# Altium PCB XXX — копия.PcbDoc (part 1 of 2)
Units mm, origin at the board's own origin, x right, y up, seen from the top; angles counter-clockwise.
Board outline 220 x 115 mm, 2 copper layers (Top Layer, Top, Bottom Layer, Bottom); 162 components, 124 nets, 635 pads, 86 vias.
Unrouted connection lines stored in the file: 138.
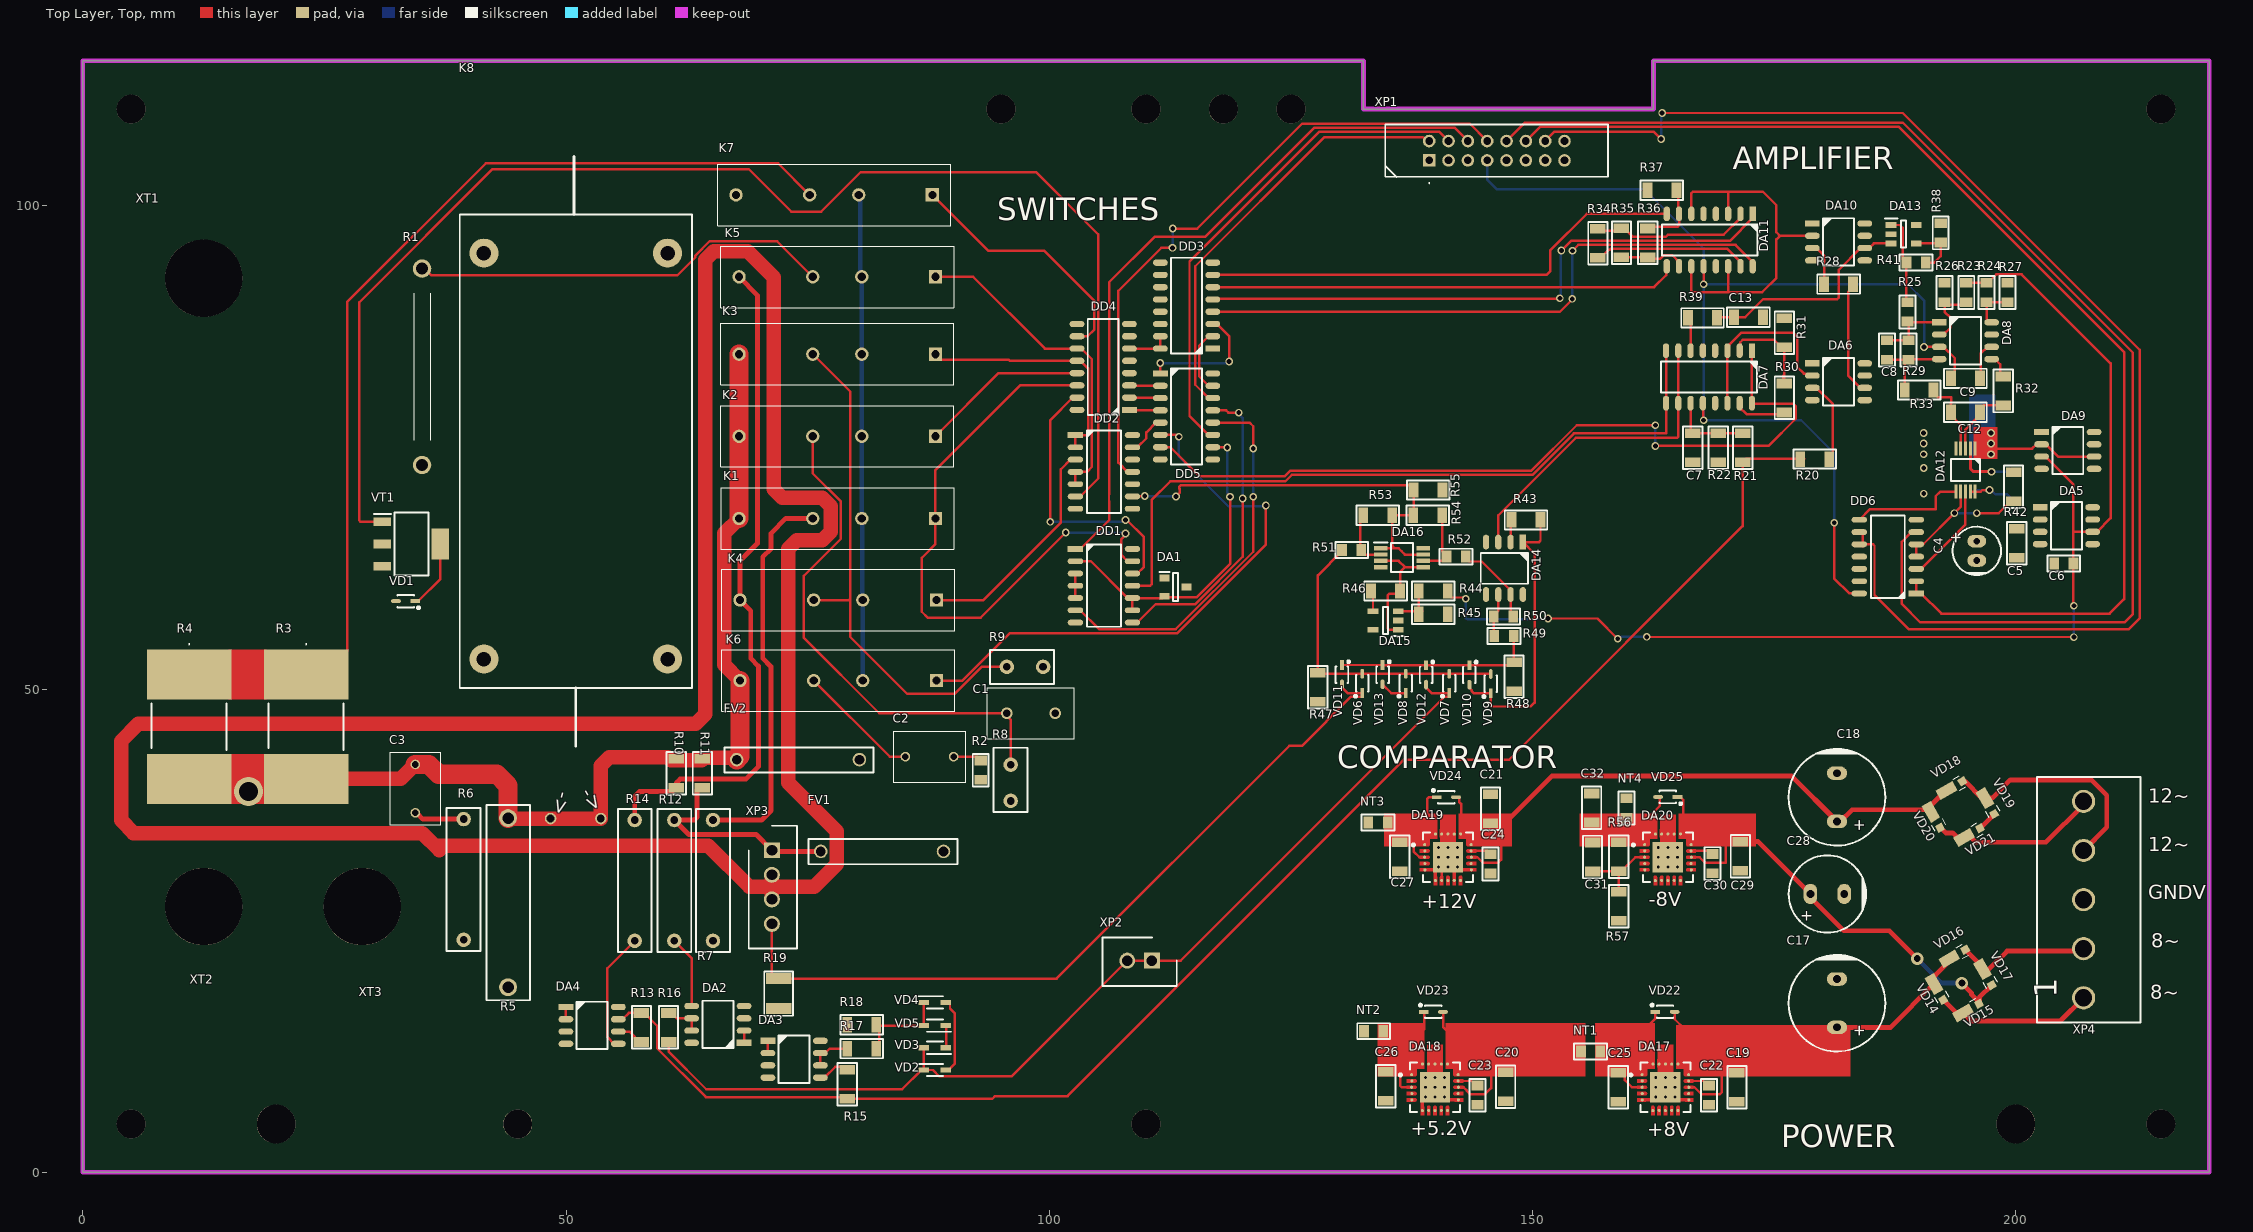
[diagram p0: Top Layer, Top view]
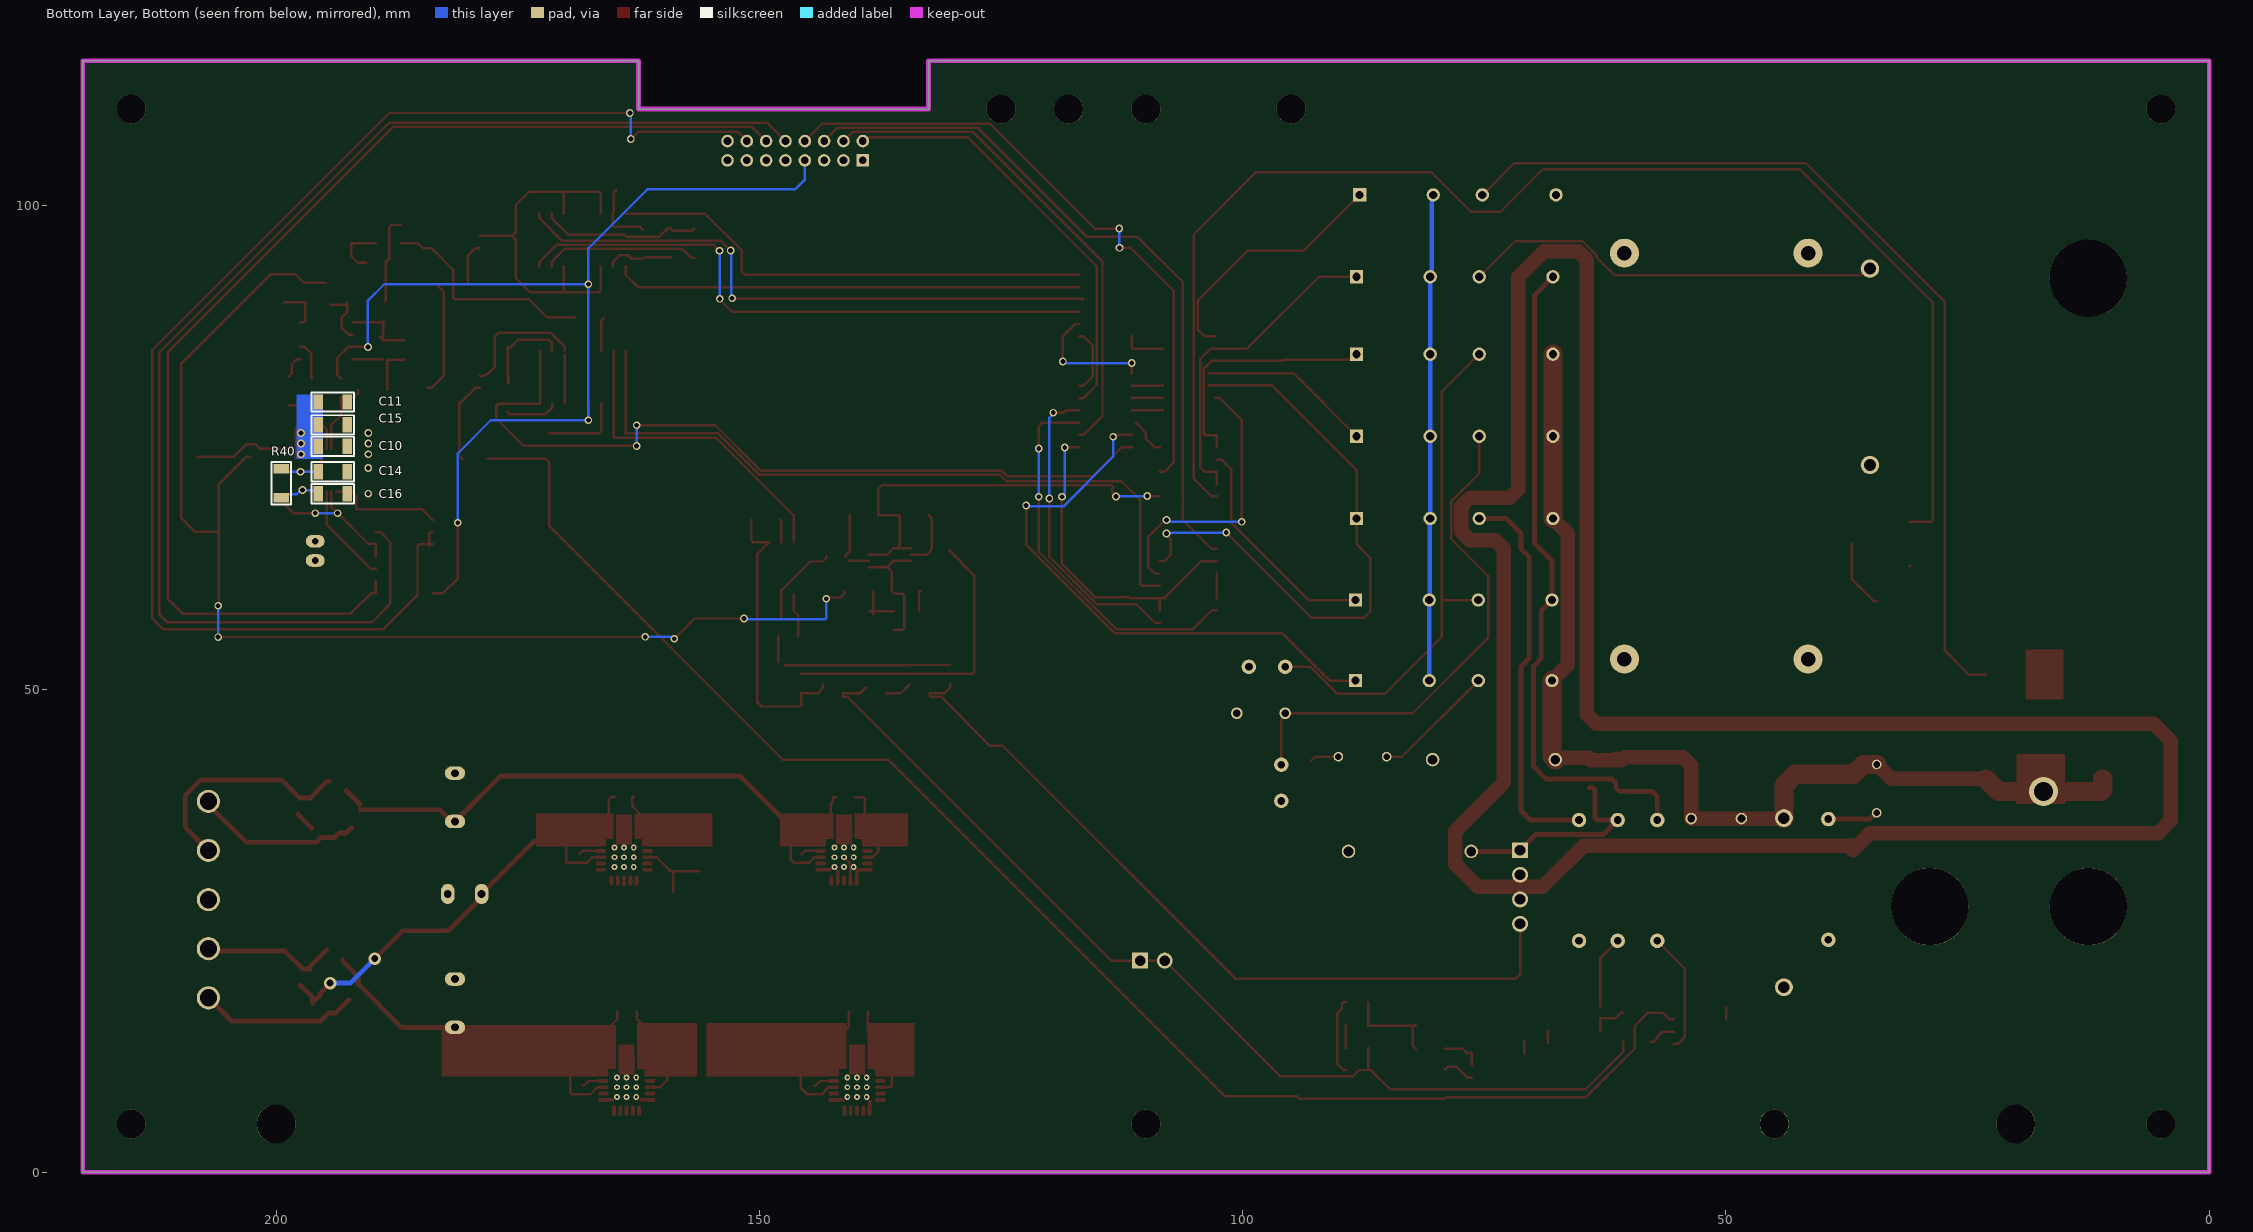
[diagram p1: Bottom Layer, Bottom view, seen from below]
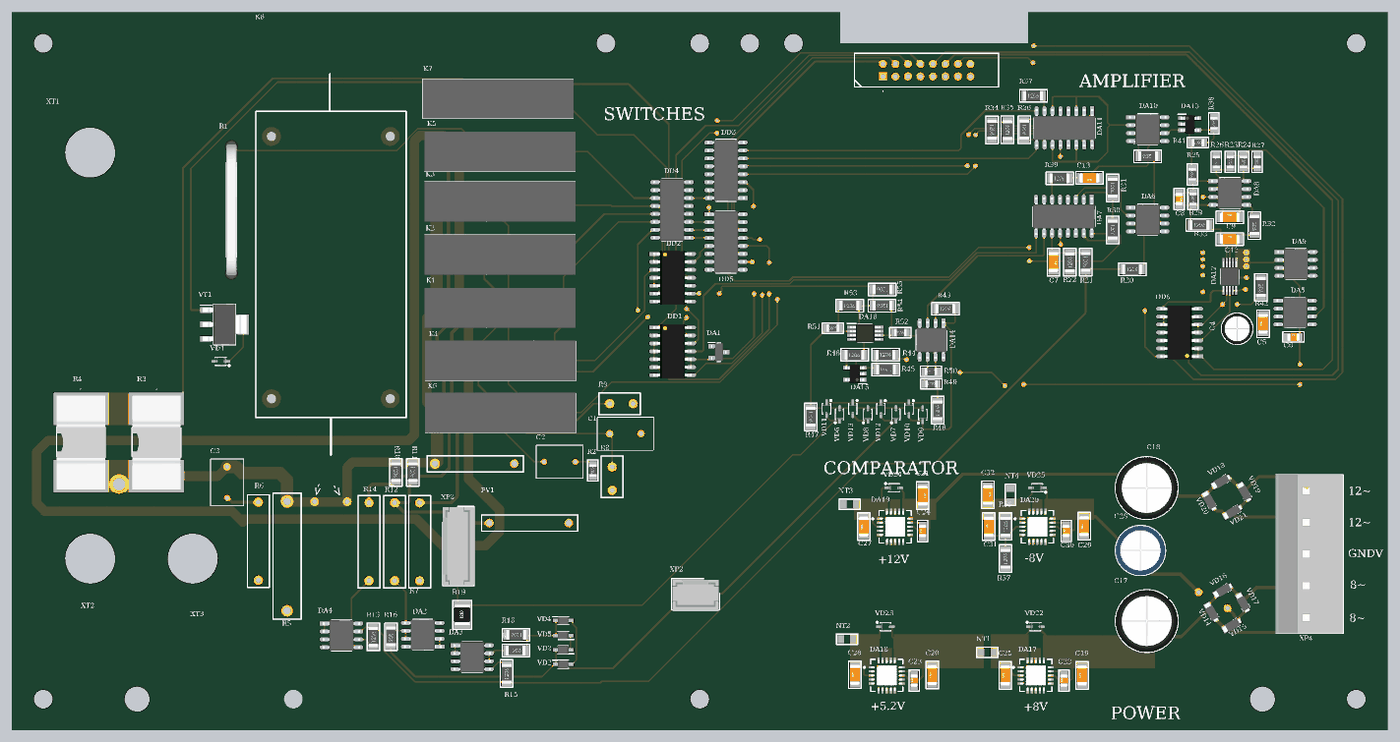
[diagram p3: 3D render of the assembled board from above, using the file's embedded part models]
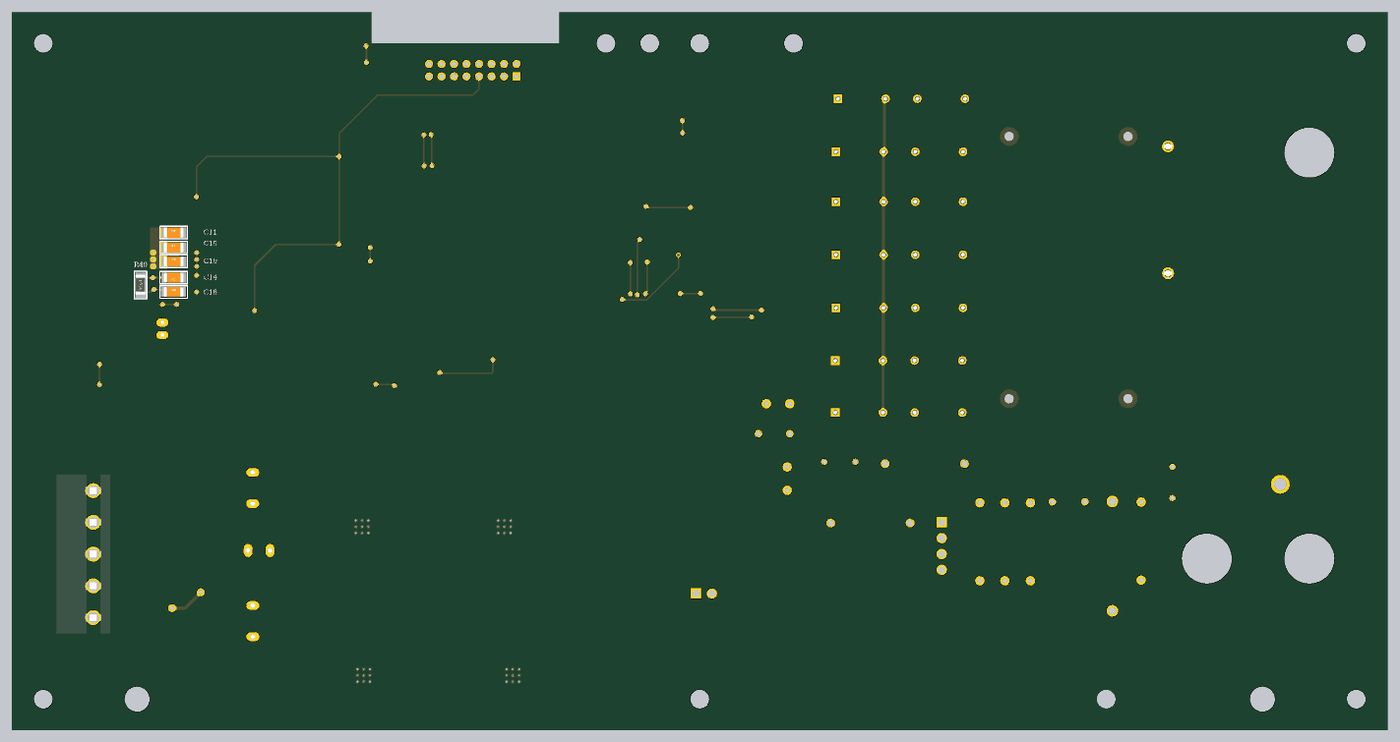
[diagram p4: 3D render of the assembled board from below, using the file's embedded part models]

## Layer stack, top to bottom
Top Solder, Top Mask: solder mask 0.0102, Solder Resist, Dk 3.5
Top Layer, Top: signal copper 0.0356
Dielectric 1: dielectric 0.32, FR-4, Dk 4.8
Bottom Layer, Bottom: signal copper 0.0356
Bottom Solder, Bot Mask: solder mask 0.0102, Solder Resist, Dk 3.5

## Board outline
132.5,110 132.5,115 0,115 0,0 220,0 220,115 162.5,115 162.5,110

## Design rules (kind name [scope] priority, off if disabled: settings)
Clearance "Clearance_Bottom Layer, Bottom" [ExistsOnLayer('Bottom Layer, Bottom') vs ExistsOnLayer('Bottom Layer, Bottom')] p1: gap=0.15 ignorepadtopadclearanceinfootprint=FALSE except(0.2: Arc-Arc Arc-Track Track-Track; 0.3: THPad-THPad)
Clearance [All] p2: gap=0.254 ignorepadtopadclearanceinfootprint=FALSE except(0.15: Arc-Arc Arc-Track Track-Track; 0.2: Arc-THPad Track-THPad THPad-THPad; 0.3: Arc-Via Track-Via THPad-Via Via-Via)
PlaneClearance [All] p1: clearance=0.254
PolygonConnect PolygonConnect_14 [IsPolygon And InNet('NET00015') And OnLayer('Bottom Layer, Bottom') vs IsVia] p1: connectstyle=Direct reliefconductorwidth=0.381 reliefentries=4 polygonreliefangle="90 Angle" airgapwidth=0.254
PolygonConnect PolygonConnect_13 [IsPolygon And InNet('NET00015') And OnLayer('Bottom Layer, Bottom') vs IsPad] p2: connectstyle=Relief reliefconductorwidth=0.5 reliefentries=4 polygonreliefangle="90 Angle" airgapwidth=0.254
PolygonConnect PolygonConnect_12 [IsPolygon And InNet('GNV') And OnLayer('Bottom Layer, Bottom') vs IsVia] p3: connectstyle=Direct reliefconductorwidth=0.381 reliefentries=4 polygonreliefangle="90 Angle" airgapwidth=0.254
PolygonConnect PolygonConnect_11 [IsPolygon And InNet('GNV') And OnLayer('Bottom Layer, Bottom') vs IsPad] p4: connectstyle=Relief reliefconductorwidth=0.3 reliefentries=4 polygonreliefangle="90 Angle" airgapwidth=0.254
PolygonConnect PolygonConnect_10 [IsPolygon And InNet('GRD') And OnLayer('Bottom Layer, Bottom') vs IsVia] p5: connectstyle=Direct reliefconductorwidth=0.381 reliefentries=4 polygonreliefangle="90 Angle" airgapwidth=0.254
PolygonConnect PolygonConnect_9 [IsPolygon And InNet('GRD') And OnLayer('Bottom Layer, Bottom') vs IsPad] p6: connectstyle=Direct reliefconductorwidth=0.5 reliefentries=4 polygonreliefangle="90 Angle" airgapwidth=0.254
PolygonConnect PolygonConnect_8 [IsPolygon And InNet('NET00070') And OnLayer('Bottom Layer, Bottom') vs IsVia] p7: connectstyle=Direct reliefconductorwidth=0.381 reliefentries=4 polygonreliefangle="90 Angle" airgapwidth=0.254
PolygonConnect PolygonConnect_7 [IsPolygon And InNet('NET00070') And OnLayer('Bottom Layer, Bottom') vs IsPad] p8: connectstyle=Direct reliefconductorwidth=0.5 reliefentries=4 polygonreliefangle="90 Angle" airgapwidth=0.254
PolygonConnect PolygonConnect_6 [IsPolygon And InNet('GNV') And OnLayer('Top Layer, Top') vs IsVia] p9: connectstyle=Direct reliefconductorwidth=0.381 reliefentries=4 polygonreliefangle="90 Angle" airgapwidth=0.254
PolygonConnect PolygonConnect_5 [IsPolygon And InNet('GNV') And OnLayer('Top Layer, Top') vs IsPad] p10: connectstyle=Relief reliefconductorwidth=0.3 reliefentries=4 polygonreliefangle="90 Angle" airgapwidth=0.254
PolygonConnect PolygonConnect_4 [IsPolygon And InNet('GRD') And OnLayer('Top Layer, Top') vs IsVia] p11: connectstyle=Direct reliefconductorwidth=0.381 reliefentries=4 polygonreliefangle="90 Angle" airgapwidth=0.254
PolygonConnect PolygonConnect_3 [IsPolygon And InNet('GRD') And OnLayer('Top Layer, Top') vs IsPad] p12: connectstyle=Direct reliefconductorwidth=0.5 reliefentries=4 polygonreliefangle="90 Angle" airgapwidth=0.254
PolygonConnect PolygonConnect_2 [IsPolygon And InNet('NET00070') And OnLayer('Top Layer, Top') vs IsVia] p13: connectstyle=Direct reliefconductorwidth=0.381 reliefentries=4 polygonreliefangle="90 Angle" airgapwidth=0.254
PolygonConnect PolygonConnect_1 [IsPolygon And InNet('NET00070') And OnLayer('Top Layer, Top') vs IsPad] p14: connectstyle=Direct reliefconductorwidth=0.5 reliefentries=4 polygonreliefangle="90 Angle" airgapwidth=0.254
PolygonConnect [All] p15: connectstyle=Relief reliefconductorwidth=0.254 reliefentries=4 polygonreliefangle="90 Angle" airgapwidth=0.254
RoutingVias [All] p1: holewidth=0.5 width=0.8 viastyle="Through Hole" minholewidth=0.5 minwidth=0.5 maxholewidth=1.2 maxwidth=1.8
SolderMaskExpansion [All] p1: expansion=0.102 istentingtop=FALSE
SupplyNets "Schematic Supply Nets_19" [InNet('GNDV')] p1: voltage=0.000
SupplyNets "Schematic Supply Nets_18" [InNet('+12V')] p2: voltage=0.000
SupplyNets "Schematic Supply Nets_17" [InNet('x8')] p3: voltage=0.000
SupplyNets "Schematic Supply Nets_16" [InNet('+5.2V')] p4: voltage=0.000
SupplyNets "Schematic Supply Nets_15" [InNet('x2')] p5: voltage=0.000
SupplyNets "Schematic Supply Nets_13" [InNet('x10')] p6: voltage=0.000
SupplyNets "Schematic Supply Nets_12" [InNet('AMP_IN')] p7: voltage=0.000
SupplyNets "Schematic Supply Nets_11" [InNet('-8V')] p8: voltage=0.000
SupplyNets "Schematic Supply Nets_10" [InNet('GRD')] p9: voltage=0.000
SupplyNets "Schematic Supply Nets_9" [InNet('x4')] p10: voltage=0.000
SupplyNets "Schematic Supply Nets_8" [InNet('U0')] p11: voltage=0.000
SupplyNets "Schematic Supply Nets_7" [InNet('x1')] p12: voltage=0.000
SupplyNets "Schematic Supply Nets_6" [InNet('C'')] p13: voltage=0.000
SupplyNets "Schematic Supply Nets_4" [InNet('Uc')] p14: voltage=0.000
SupplyNets "Schematic Supply Nets_3" [InNet('+4.096V')] p15: voltage=0.000
SupplyNets "Schematic Supply Nets_2" [InNet('+8V')] p16: voltage=0.000
SupplyNets "Schematic Supply Nets_1" [InNet('-5.2V')] p17: voltage=0.000
SupplyNets "Schematic Supply Nets" [InNet('нА')] p18: voltage=0.000
Width Width_1 [InNet('GRD')] p1: maxlimit=1.5 minlimit=1.5 preferedwidth=1.5
Width [All] p2: maxlimit=1.5 minlimit=0.25 preferedwidth=0.25
29 further rules are at their usual default settings.

## Classes and differential pairs
component class Switches: C1 C2 C3 DA1 DA2 DA3 DA4 DD1 DD2 DD3 DD4 DD5 FV1 FV2 K1 K2 K3 K4 K5 K6 K7 K8 R1 R2 R3 R4 R5 R6 R7 R8 R9 R10 R11 R12 R13 R14 R15 R16 R17 R18 R19 S1 S2 VD1 VD2 VD3 VD4 VD5 VT1 X1 X2 X3 XP1 XP2 XP3 XP? XT1 XT2 XT3
component class PowerSupply: C17 C18 C19 C20 C21 C22 C23 C24 C25 C26 C27 C28 C29 C30 C31 C32 DA17 DA18 DA19 DA20 NT1 NT2 NT3 NT4 R56 R57 VD14 VD15 VD16 VD17 VD18 VD19 VD20 VD21 VD22 VD23 VD24 VD25 XP4
component class Comparator: DA14 DA15 DA16 R43 R44 R45 R46 R47 R48 R49 R50 R51 R52 R53 R54 R55 VD6 VD7 VD8 VD9 VD10 VD11 VD12 VD13
component class Amplifier: C4 C5 C6 C7 C8 C9 C10 C11 C12 C13 C14 C15 C16 DA5 DA6 DA7 DA8 DA9 DA10 DA11 DA12 DA13 DD6 R20 R21 R22 R23 R24 R25 R26 R27 R28 R29 R30 R31 R32 R33 R34 R35 R36 R37 R38 R39 R40 R41 R42

## Components (designator, comment, footprint, x,y, rotation, side; value= is the part's Value field where it differs from the comment)
C1 "К10-47Мб-500 В-3300 пФ+-10%" К10-47Мб-L9 98.1,47.5 r180 top
C2 "К10-47Мб-500 В-15 нФ +-10%" К10-47Мб-L7.5 90.1,43 r180 top
C3 "К10-47Мб-500 В-270 пФ +-10%" К10-47Мб-L7.5 34.4,37.2 r90 top
C4 "JRB-50В-4,7мкФ" "CAP TH ALUM ELEC D5.00mm S2.00mm H11.00mm" 195.955,64.3 r90 top
C5 "1206-X7R-50 B-0,1 мкФ+-10%" "CAP: 1206" 200.1,65.1 r90 top value="0,1 мкФ"
C6 "0805-X7R-25 В-0,1 мкФ +-10%" "CAP: 0805" 204.955,63 r0 top value="0,1 мкФ"
C7 "1206-X7R-50 B-0,01 мкФ+-10%" "CAP: 1206" 166.571,74.978 r270 top value="0,01 мкФ"
C8 "0805-C0G-50 В-240 пФ +-5%" "CAP: 0805" 186.684,85.08 r270 top value="10 пФ"
C9 "1206-X7R-50 B-0,1 мкФ+-10%" "CAP: 1206" 194.784,82.14 r0 top value="0,1 мкФ"
C10 "1206-X7R-10 B-10 мкФ+-10%" "CAP: 1206" 194.134,75.105 r180 bottom value="10 мкФ"
C11 "1206-X7R-50 B-2,2 мкФ+-10%" "CAP: 1206" 194.134,79.7 r180 bottom value="2,2 мкФ"
C12 "1206-X7R-50 B-0,01 мкФ+-10%" "CAP: 1206" 194.784,78.64 r0 top value="0,01 мкФ"
C13 "1206-X7R-50 B-0,01 мкФ+-10%" "CAP: 1206" 172.333,88.474 r180 top value="0,01 мкФ"
C14 "1206-X7R-50 B-2,2 мкФ+-10%" "CAP: 1206" 194.134,72.489 r0 bottom value="2,2 мкФ"
C15 "1206-X7R-50 B-2,2 мкФ+-10%" "CAP: 1206" 194.134,77.327 r180 bottom value="2,2 мкФ"
C16 "1206-X7R-50 B-0,33 мкФ+-10%" "CAP: 1206" 194.155,70.2 r180 bottom value="0,33 мкФ"
C17 "JRB-25В-1000 мкФ" "CAP TH ALUM ELEC D10.00mm S5.00mm H21.00mm" 181.493,17.5 r270 top
C18 "JRB-35В-470мкФ" "CAP TH ALUM ELEC D10.00mm S5.00mm H17.00mm" 181.493,38.8 r270 top
C19 "1206-X7R-50 B-10 мкФ+-10%" "CAP: 1206" 171.143,8.8 r90 top value="10 мкФ"
C20 "1206-X7R-50 B-10 мкФ+-10%" "CAP: 1206" 147.2,8.867 r90 top value="10 мкФ"
C21 "1206-X7R-50 B-10 мкФ+-10%" "CAP: 1206" 145.643,37.6 r270 top value="10 мкФ"
C22 "0805-X7R-25 В-1 мкФ +-10%" "CAP: 0805" 168.243,7.975 r90 top value="1 мкФ"
C23 "0805-X7R-25 В-1 мкФ +-10%" "CAP: 0805" 144.3,7.975 r90 top value="1 мкФ"
C24 "0805-X7R-25 В-1 мкФ +-10%" "CAP: 0805" 145.643,31.915 r90 top value="1 мкФ"
C25 "1206-X7R-25 B-47мкФ+-10%" "CAP: 1206" 158.86,8.8 r90 top value="51 пФ"
C26 "1206-X7R-25 B-47мкФ+-10%" "CAP: 1206" 134.8,8.899 r90 top value="51 пФ"
C27 "1206-X7R-25 B-47мкФ+-10%" "CAP: 1206" 136.243,32.635 r90 top value="51 пФ"
C28 "JRB-25В-220мкФ" "CAP TH ALPOLY D8.00mm S3.50mm H12.00mm" 180.493,28.8 r180 top
C29 "1206-X7R-50 B-10 мкФ+-10%" "CAP: 1206" 171.5,32.711 r90 top value="10 мкФ"
C30 "0805-X7R-25 В-1 мкФ +-10%" "CAP: 0805" 168.6,31.933 r90 top value="1 мкФ"
C31 "1206-X7R-50 B-0,01 мкФ+-10%" "CAP: 1206" 156.2,32.625 r90 top value="0,01 мкФ"
C32 "1206-X7R-25 B-47мкФ+-10%" "CAP: 1206" 156.1,37.7 r270 top value="51 пФ"
DA1 "MAX809S" SOT-23-3 111.9,61.5 r0 top
DA2 "TLV9152IDR" 8-SOIC 65.7,15.3 r180 top
DA3 "TLV9152IDR" 8-SOIC 73.6,11.7 r0 top
DA4 "TLV9152IDR" 8-SOIC 52.7,15.2 r0 top
DA5 "ADR434BR" 8-SOIC 205.23,66.9 r0 top
DA6 "ADA4637-1ARZ" 8-SOIC 181.651,81.795 r0 top
DA7 "ADG433BR" 16-SOIC 168.248,82.295 r270 top
DA8 "ADA4941-1YRZ" 8-SOIC 194.784,86.04 r0 top
DA9 "AD8031BRZ" 8-SOIC 205.372,74.685 r0 top
DA10 "ADA4637-1ARZ" 8-SOIC 181.651,96.258 r0 top
DA11 "ADG431BR" 16-SOIC 168.324,96.458 r270 top
DA12 "AD7691BRM" 10-MSOP 194.784,72.655 r270 top
DA13 "TLV9151IDR" SOT-23-5 188.378,97.063 r0 top
DA14 "TLV9152IDR" 8-SOIC 147.084,62.493 r270 top
DA15 "TLV9151IDR" SOT-23-5 134.784,57.093 r180 top
DA16 "TLV1842" 8-VSSOP 136.484,63.593 r0 top
DA17 "TPS7A4701" 20-VQFN 163.743,8.8 r0 top
DA18 "TPS7A4701" 20-VQFN 139.9,8.8 r0 top
DA19 "TPS7A4701" 20-VQFN 141.243,32.6 r0 top
DA20 "TPS7A3301" 20-VQFN 164,32.6 r0 top
DD1 "IN74HC00AD" 14-soic 102.7,64.497 r0 top
DD2 "IN74HC08AD" 14-SOIC 102.7,76.279 r0 top
DD3 "IN74HC139AD" 16-SOIC 114.2,89.674 r180 top
DD4 "IN74HC138AD" 16-SOIC 105.575,83.323 r180 top
DD5 "IN74HC595AD" 16-SOIC 114.2,78.2 r0 top
DD6 "IN74HC08AD" 14-SOIC 189.7,59.89 r180 top
FV1 "2027-09-B19" 2027-09-B19 82.7,33.2 r180 top
FV2 "2027-09-B19" 2027-09-B19 74,42.7 r180 top
K1 "SIL05-1A72-71L" SIL05 88.218,67.65 r180 top
K2 "SIL05-1A72-71L" SIL05 88.218,76.15 r180 top
K3 "SIL05-1A72-71L" SIL05 88.218,84.65 r180 top
K4 "SIL05-1A72-71L" SIL05 88.317,59.211 r180 top
K5 "SIL05-1A72-71L" SIL05 88.218,92.65 r180 top
K6 "SIL05-1A72-71L" SIL05 88.317,50.878 r180 top
K7 "SIL05-1A72-71L" SIL05 87.9,101.128 r180 top
K8 "УШЯИ.685442.092vs2Rel" УШЯИ.685442.092vs2Rel 51,50.1 r90 top locked
NT1 "NetTie" NetTie 157,12.5 r180 top net-tie
NT2 "NetTie" NetTie 134.557,14.6 r180 top net-tie
NT3 "NetTie" NetTie 135,36.2 r180 top net-tie
NT4 "NetTie" NetTie 159.7,36.7 r90 top net-tie
R1 "OAR5-R050FLF" OAR5 35.1,73.18 r90 top value="0.05 Ом"
R2 "0805-27 Ом+-5%" 0805 92.9,41.6 r90 top value="27 Ом"
R3 "WSL5931L5000FEA" WSL5931L5000FEA 23.1,46.1 r270 top value="0,5 миллиОм"
R4 "WSL5931L5000FEA" WSL5931L5000FEA 11,46.1 r270 top value="0,5 миллиОм"
R5 "С2-29В-0,25-4,99 МОм +-0.1%" С2-29В-0,25(140.02.0204.00.00) 44,27.9 r90 top
R6 "С2-29В-0,125-22 Ом +-0.1%-1,0-А" С2-29В-0,125(140.02.0202.00.00) 39.4,30.3 r90 top
R7 "С2-29В-0,125-49,9 кОм +-0.1%-1,0-А" С2-29В-0,125(140.02.0202.00.00) 65.2,30.2 r90 top
R8 "С2-29В-0,125-499 Ом +-0.1%-1,0-А" С2-29В-0,125(220.03.0401.00.00) 96,40.3 r90 top
R9 "С2-29В-0,125-4,99 Ом +-0.1%-1,0-А" С2-29В-0,125(220.03.0401.00.00) 97.475,52.3 r180 top
R10 "1206-91 кОм+-5%" 1206 61.391,41.3 r270 top value="91 кОм"
R11 "1206-100 Ом+-5%" 1206 64.108,41.3 r270 top value="100 Ом"
R12 "С2-29В-0,125-332 кОм+-0.1%-1,0-А" С2-29В-0,125(140.02.0202.00.00) 61.2,30.2 r90 top
R13 "1206-470 Ом+-5%" 1206 57.8,14.99 r90 top value="470 Ом"
R14 "С2-29В-0,125-332 кОм+-0.1%-1,0-А" С2-29В-0,125(140.02.0202.00.00) 57.1,30.2 r90 top
R15 "1206-470 Ом+-5%" 1206 79.096,9.1 r90 top value="470 Ом"
R16 "1206-51 Ом+-5%" 1206 60.6,14.99 r270 top value="51 Ом"
R17 "1206-22 Ом+-5%" 1206 80.596,12.805 r0 top value="22 Ом"
R18 "1206-22 Ом+-5%" 1206 80.596,15.277 r180 top value="22 Ом"
R19 "1210-1,1 кОм+-5%" 1210 72,18.5 r90 top value="1,1 кОм"
R20 "1206-470 Ом+-5%" 1206 179.2,73.8 r0 top value="470 Ом"
R21 "1206-5,1 кОм+-5%" 1206 171.729,74.97 r270 top value="5,1 кОм"
R22 "1206-20 кОм+-5%" 1206 169.196,74.97 r90 top value="20 кОм"
R23 "0805-1 кОм+-0,1%" 0805 194.868,91.02 r270 top value="1 кОм"
R24 "0805-1 кОм+-0,1%" 0805 196.968,91.02 r270 top value="1 кОм"
R25 "0805-1 кОм+-0,1%" 0805 188.784,89.02 r270 top value="1 кОм"
R26 "0805-1 кОм+-0,1%" 0805 192.618,91.02 r90 top value="1 кОм"
R27 "0805-332 Ом+-0,1%" 0805 199.147,91.02 r270 top value="332 Ом"
R28 "1206-470 Ом+-5%" 1206 181.651,91.9 r180 top value="470 Ом"
R29 "0805-1 кОм+-0,1%" 0805 188.884,85.08 r270 top value="1 кОм"
R30 "1206-9,09 кОм+-1%" 1206 176.048,80.12 r270 top value="9,09 кОм"
R31 "1206-1 кОм+-1%" 1206 176.048,86.85 r270 top value="1 кОм"
R32 "1206-51 Ом+-5%" 1206 198.684,80.84 r270 top value="51 Ом"
R33 "1206-51 Ом+-5%" 1206 189.984,80.94 r0 top value="51 Ом"
R34 "1206-4,02 кОм+-0,1%" 1206 156.756,96.133 r270 top value="4,02 кОм"
R35 "1206-2 кОм+-0.1%" 1206 159.193,96.164 r90 top value="2 кОм"
R36 "1206-1 кОм+-0.1%" 1206 161.924,96.158 r270 top value="1 кОм"
R37 "1206-1 кОм+-0.1%" 1206 163.378,101.6 r0 top value="1 кОм"
R38 "0805-1 кОм+-0,1%" 0805 192.225,97.2 r270 top value="1 кОм"
R39 "1206-5,1 кОм+-5%" 1206 167.578,88.4 r0 top value="5,1 кОм"
R40 "1206-10 Ом+-5%" 1206 199.455,71.3 r270 bottom value="10 Ом"
R41 "0805-845 Ом+-0,1%" 0805 189.678,94.123 r180 top value="845 Ом"
R42 "1206-10 кОм+-5%" 1206 199.755,70.93 r270 top value="10 кОм"
R43 "1206-470 Ом+-5%" 1206 149.314,67.495 r0 top value="470 Ом"
R44 "1206-7,15 кОм+-1%" 1206 139.732,60.146 r0 top value="7,15 кОм"
R45 "1206-10 кОм+-0,5%" 1206 139.732,57.743 r180 top value="10 кОм"
R46 "1206-470 Ом+-5%" 1206 134.784,60.146 r0 top value="470 Ом"
R47 "1206-2,4 кОм+-5%" 1206 127.776,50.193 r270 top value="2,4 кОм"
R48 "1206-2,4 кОм+-5%" 1206 148.076,51.281 r90 top value="2,4 кОм"
R49 "0805-1 кОм+-0,1%" 0805 147.044,55.488 r180 top value="1 кОм"
R50 "0805-1 кОм+-0,1%" 0805 146.984,57.493 r0 top value="1 кОм"
R51 "0805-1 кОм+-0,1%" 0805 131.284,64.393 r0 top value="1 кОм"
R52 "0805-1 кОм+-0,1%" 0805 142.084,63.693 r180 top value="1 кОм"
R53 "1206-510 кОм+-1%" 1206 133.984,67.993 r0 top value="510 кОм"
R54 "1206-510 кОм+-1%" 1206 139.159,67.993 r180 top value="510 кОм"
R55 "1206-4,7 кОм+-5%" 1206 139.184,70.593 r180 top value="4,7 кОм"
R56 "1206-1,24 МОм+-1%" 1206 158.9,32.66 r90 top value="1,24 МОм"
R57 "1206-221 кОм+-1%" 1206 158.9,27.525 r90 top value="221 кОм"
VD1 "1N4148WS" SOD-323F 33.4,59.1 r180 top
VD2 "1N4007WS" SOD-323 88.164,10.587 r0 top
VD3 "1N4007WS" SOD-323 88.164,12.887 r180 top
VD4 "1N4007WS" SOD-323 88.164,17.575 r0 top
VD5 "1N4007WS" SOD-323 88.164,15.187 r180 top
VD6 "1N4148WS" SOD-323F 132.372,50.587 r90 top
VD7 "1N4148WS" SOD-323F 141.372,50.587 r90 top
VD8 "1N4148WS" SOD-323F 136.872,50.587 r90 top
VD9 "1N4148WS" SOD-323F 145.661,50.555 r90 top
VD10 "1N4148WS" SOD-323F 143.461,51.455 r270 top
VD11 "1N4148WS" SOD-323F 130.272,51.487 r270 top
VD12 "1N4148WS" SOD-323F 138.972,51.461 r270 top
VD13 "1N4148WS" SOD-323F 134.472,51.487 r270 top
VD14 "V1P22" DO-219AD 191.924,18.798 r300 top
VD15 "V1P22" DO-219AD 195.227,16.888 r30 top
VD16 "V1P22" DO-219AD 193.805,22.486 r30 top
VD17 "V1P22" DO-219AD 196.953,20.325 r300 top
VD18 "V1P22" DO-219AD 193.51,39.903 r30 top
VD19 "V1P22" DO-219AD 197.198,38.023 r300 top
VD20 "V1P22" DO-219AD 191.6,36.6 r300 top
VD21 "V1P22" DO-219AD 195.34,35.049 r30 top
VD22 "1N4148WS" SOD-323F 163.7,16.6 r0 top
VD23 "1N4148WS" SOD-323F 139.725,16.6 r0 top
VD24 "1N4148WS" SOD-323F 141.068,38.817 r0 top
VD25 "1N4148WS" SOD-323F 163.983,38.836 r180 top
VT1 "FZT658" SOT-23-4 31,67.3 r180 top
XP1 "DS1014-16SF1B" DS1014-16S 139.3,104.7 r0 top
XP2 "280370-2" 280370-2 110.6,21.9 r180 top
XP3 "280371-2" 280371-2 71.3,33.32 r270 top
XP4 "DS1074-5MVT6" DS1074-5MV 207,18.06 r90 top
XT1 "УШЯИ.685631.123" УШЯИ.685631.123 12.5,92.5 r0 top locked
XT2 "УШЯИ.685631.123" УШЯИ.685631.123 12.5,27.5 r0 top locked
XT3 "УШЯИ.685631.123" УШЯИ.685631.123 28.9,27.5 r0 top locked

## Footprints (in the part's own frame and the unit in brackets; to place one, negate y for a bottom-side part, rotate by r counter-clockwise, add the part's x,y. Pads: shape width x height; smd on the part's side, far side on the other; paste and mask are expansions set on the pad)
8-SOIC [mm] "Body 3.9mmx4.9mm 1.27 pitch"
  rect 1.525x0.65 smd: 1(-2.712,1.905)
  oval 1.525x0.65 smd: 2(-2.712,0.635) 3(-2.712,-0.635) 4(-2.712,-1.905) 5(2.712,-1.905) 6(2.712,-0.635) 7(2.712,0.635) 8(2.712,1.905)
  silkscreen extent -1.6,-2.45 1.6,2.45, body extent -3,-2.45 3,2.45, height 1.75
8-VSSOP [mm]
  rect 1.4x0.45 smd: 1(-2.2,0.975) 2(-2.2,0.325) 3(-2.2,-0.325) 4(-2.2,-0.975) 5(2.2,-0.975) 6(2.2,-0.325) 7(2.2,0.325) 8(2.2,0.975)
  silkscreen extent -2.9,-1.5 1.15,1.55, body extent -2.45,-1.5 2.45,1.5, height 1.1
10-MSOP [mm] "3x3 mm, pitch 0.5 mm"
  rect 1.45x0.3 smd: 1(-2.225,1) 2(-2.225,0.5) 3(-2.225,0) 4(-2.225,-0.5) 5(-2.225,-1) 6(2.225,-1) 7(2.225,-0.5) 8(2.225,0) 9(2.225,0.5) 10(2.225,1)
  silkscreen extent -1.15,-1.5 1.15,1.5, body extent -2.45,-1.5 2.45,1.5, height 0.95
14-soic [mm] "Body 8.6x3.9mm, pitch 1.27 mm"
  rect 1.6x0.6 smd: 1(0,0)
  rrect100% 1.6x0.6 smd: 2(0,-1.27) 3(0,-2.54) 4(0,-3.81) 5(0,-5.08) 6(0,-6.35) 7(0,-7.62) 8(5.9,-7.62) 9(5.9,-6.35) 10(5.9,-5.08) 11(5.9,-3.81) 12(5.9,-2.54) 13(5.9,-1.27) 14(5.9,0)
  round 0.5 on Mech13: ""(0.5,0)
  silkscreen extent 1.2,-8.05 4.7,0.45, body extent -0.12,-8.15 6.02,0.55, height 1.78
14-SOIC [mm] "Body 8.6x3.9mm, pitch 1.27 mm"
  rect 1.6x0.6 smd: 1(0,0)
  rrect100% 1.6x0.6 smd: 2(0,-1.27) 3(0,-2.54) 4(0,-3.81) 5(0,-5.08) 6(0,-6.35) 7(0,-7.62) 8(5.9,-7.62) 9(5.9,-6.35) 10(5.9,-5.08) 11(5.9,-3.81) 12(5.9,-2.54) 13(5.9,-1.27) 14(5.9,0)
  round 0.5 on Mech13: ""(0.5,0)
  silkscreen extent 1.2,-8.05 4.7,0.45, body extent -0.12,-8.15 6.02,0.55, height 1.78
16-SOIC [mm] "Body 3.9mm×9.9mm 1.27 pitch"
  rect 1.525x0.65 smd: 1(-2.712,4.445)
  oval 1.525x0.65 smd: 2(-2.712,3.175) 3(-2.712,1.905) 4(-2.712,0.635) 5(-2.712,-0.635) 6(-2.712,-1.905) 7(-2.712,-3.175) 8(-2.712,-4.445) 9(2.712,-4.445) 10(2.712,-3.175) 11(2.712,-1.905) 12(2.712,-0.635) 13(2.712,0.635) 14(2.712,1.905) 15(2.712,3.175) 16(2.712,4.445)
  silkscreen extent -1.6,-4.95 1.6,4.95, body extent -3,-4.95 3,4.95, height 1.75
20-VQFN [mm]
  round 0.315 smd paste-1000 mask+0: 1(-2.418,1.3) 2(-2.4,0.65) 3(-2.418,0) 4(-2.4,-0.65) 5(-2.4,-1.3) 6(-1.3,-2.418) 7(-0.65,-2.4) 8(0,-2.418) 9(0.65,-2.4) 10(1.3,-2.4) 11(2.418,-1.3) 12(2.4,-0.65) 13(2.418,0) 14(2.4,0.65) 15(2.4,1.3) 16(1.3,2.418) 17(0.65,2.4) 18(0,2.418) 19(-0.65,2.4) 20(-1.3,2.4)
  rect 3.15x3.15 smd paste-1000 mask+0: 21(0,0)
  Top Layer, Top region: -1.125,2.9 -1.125,2.075 -1.138,2.008 -1.176,1.951 -1.233,1.913 -1.3,1.9 -1.3,1.9 -1.367,1.913 -1.424,1.951 -1.462,2.008 -1.475,2.075 -1.475,2.075 -1.475,2.9
  Top Layer, Top region: -2.9,1.475 -2.075,1.475 -2.008,1.462 -1.951,1.424 -1.913,1.367 -1.9,1.3 -1.9,1.3 -1.913,1.233 -1.951,1.176 -2.008,1.138 -2.075,1.125 -2.075,1.125 -2.9,1.125
  Top Layer, Top region: -2.9,0.175 -2.075,0.175 -2.008,0.162 -1.951,0.124 -1.913,0.067 -1.9,0 -1.9,0 -1.913,-0.067 -1.951,-0.124 -2.008,-0.162 -2.075,-0.175 -2.075,-0.175 -2.9,-0.175
  Top Layer, Top region: -2.9,-1.125 -2.075,-1.125 -2.008,-1.138 -1.951,-1.176 -1.913,-1.233 -1.9,-1.3 -1.9,-1.3 -1.913,-1.367 -1.951,-1.424 -2.008,-1.462 -2.075,-1.475 -2.075,-1.475 -2.9,-1.475
  Top Layer, Top region: 2.9,-1.475 2.075,-1.475 2.008,-1.462 1.951,-1.424 1.913,-1.367 1.9,-1.3 1.9,-1.3 1.913,-1.233 1.951,-1.176 2.008,-1.138 2.075,-1.125 2.075,-1.125 2.9,-1.125
  Top Layer, Top region: -0.825,-2.9 -0.825,-2.075 -0.812,-2.008 -0.774,-1.951 -0.717,-1.913 -0.65,-1.9 -0.65,-1.9 -0.583,-1.913 -0.526,-1.951 -0.488,-2.008 -0.475,-2.075 -0.475,-2.075 -0.475,-2.9
  Top Layer, Top region: 0.825,2.9 0.825,2.075 0.812,2.008 0.774,1.951 0.717,1.913 0.65,1.9 0.65,1.9 0.583,1.913 0.526,1.951 0.488,2.008 0.475,2.075 0.475,2.075 0.475,2.9
  Top Layer, Top region: 0.175,2.9 0.175,2.075 0.162,2.008 0.124,1.951 0.067,1.913 0,1.9 0,1.9 -0.067,1.913 -0.124,1.951 -0.162,2.008 -0.175,2.075 -0.175,2.075 -0.175,2.9
  Top Layer, Top region: -0.475,2.9 -0.475,2.075 -0.488,2.008 -0.526,1.951 -0.583,1.913 -0.65,1.9 -0.65,1.9 -0.717,1.913 -0.774,1.951 -0.812,2.008 -0.825,2.075 -0.825,2.075 -0.825,2.9
  Top Layer, Top region: 1.475,2.9 1.475,2.075 1.462,2.008 1.424,1.951 1.367,1.913 1.3,1.9 1.3,1.9 1.233,1.913 1.176,1.951 1.138,2.008 1.125,2.075 1.125,2.075 1.125,2.9
  Top Layer, Top region: 1.125,-2.9 1.125,-2.075 1.138,-2.008 1.176,-1.951 1.233,-1.913 1.3,-1.9 1.3,-1.9 1.367,-1.913 1.424,-1.951 1.462,-2.008 1.475,-2.075 1.475,-2.075 1.475,-2.9
  Top Layer, Top region: 0.475,-2.9 0.475,-2.075 0.488,-2.008 0.526,-1.951 0.583,-1.913 0.65,-1.9 0.65,-1.9 0.717,-1.913 0.774,-1.951 0.812,-2.008 0.825,-2.075 0.825,-2.075 0.825,-2.9
  Top Layer, Top region: -0.175,-2.9 -0.175,-2.075 -0.162,-2.008 -0.124,-1.951 -0.067,-1.913 0,-1.9 0,-1.9 0.067,-1.913 0.124,-1.951 0.162,-2.008 0.175,-2.075 0.175,-2.075 0.175,-2.9
  Top Layer, Top region: -1.475,-2.9 -1.475,-2.075 -1.462,-2.008 -1.424,-1.951 -1.367,-1.913 -1.3,-1.9 -1.3,-1.9 -1.233,-1.913 -1.176,-1.951 -1.138,-2.008 -1.125,-2.075 -1.125,-2.075 -1.125,-2.9
  Top Layer, Top region: 2.9,1.125 2.075,1.125 2.008,1.138 1.951,1.176 1.913,1.233 1.9,1.3 1.9,1.3 1.913,1.367 1.951,1.424 2.008,1.462 2.075,1.475 2.075,1.475 2.9,1.475
  Top Layer, Top region: 2.9,0.475 2.075,0.475 2.008,0.488 1.951,0.526 1.913,0.583 1.9,0.65 1.9,0.65 1.913,0.717 1.951,0.774 2.008,0.812 2.075,0.825 2.075,0.825 2.9,0.825
  Top Layer, Top region: 2.9,-0.175 2.075,-0.175 2.008,-0.162 1.951,-0.124 1.913,-0.067 1.9,0 1.9,0 1.913,0.067 1.951,0.124 2.008,0.162 2.075,0.175 2.075,0.175 2.9,0.175
  Top Layer, Top region: 2.9,-0.825 2.075,-0.825 2.008,-0.812 1.951,-0.774 1.913,-0.717 1.9,-0.65 1.9,-0.65 1.913,-0.583 1.951,-0.526 2.008,-0.488 2.075,-0.475 2.075,-0.475 2.9,-0.475
  Top Layer, Top region: -2.9,-0.475 -2.075,-0.475 -2.008,-0.488 -1.951,-0.526 -1.913,-0.583 -1.9,-0.65 -1.9,-0.65 -1.913,-0.717 -1.951,-0.774 -2.008,-0.812 -2.075,-0.825 -2.075,-0.825 -2.9,-0.825
  Top Layer, Top region: -2.9,0.825 -2.075,0.825 -2.008,0.812 -1.951,0.774 -1.913,0.717 -1.9,0.65 -1.9,0.65 -1.913,0.583 -1.951,0.526 -2.008,0.488 -2.075,0.475 -2.075,0.475 -2.9,0.475
  silkscreen extent -3.7,-2.58 2.58,2.58, body extent -3,-3 3,3, height 0.25
0805 [mm] "Resistor SMD"
  rect 1x1.25 smd: 1(-1,0) 2(1,0)
  silkscreen extent -1.7,-0.82 1.7,0.82, body extent -1,-0.6 1,0.6, height 0.44
1206 [mm] "Resistor SMD"
  rect 1x1.6 smd: 1(-1.5,0) 2(1.5,0)
  silkscreen extent -2.2,-1 2.2,1, body extent -1.65,-0.8 1.55,0.8, height 0.47
1210 [mm] "Resistor SMD"
  rect 1.1x2.6 smd: 1(-1.55,0) 2(1.55,0)
  silkscreen extent -2.3,-1.5 2.3,1.5, body extent -1.6,-1.25 1.6,1.25, height 0.6
2027-09-B19 [mm]
  round 1.4 hole 1 unplated: 1(-6.35,0) 2(6.35,0)
  silkscreen extent -7.8,-1.27 7.6,1.33, body extent -3,-4 3,4, height 10
280370-2 [mm] "AMPMODU 2"
  rect 1.65x1.65 hole 1.1: 1(0,0)
  round 1.65 hole 1.1: 2(2.54,0)
  silkscreen extent -2.58,-2.4 5.12,2.6, body extent -2.41,-2.2 4.96,2.8, height 12.6
280371-2 [mm] "AMPMODU 2"
  rect 1.65x1.65 hole 1.1: 1(0,0)
  round 1.65 hole 1.1: 2(2.54,0) 3(5.08,0) 4(7.62,0)
  silkscreen extent -2.54,-2.4 10.16,2.6, body extent -2.42,-2.4 10.03,2.6, height 12.6
"CAP TH ALPOLY D8.00mm S3.50mm H12.00mm" [mm] "8.00mm Diameter 12.00mm Lead Spacing Aluminum - Polymer Capacitors Radial, Can"
  oval 1.4x2.1 hole 0.8: 1(1.75,0) 2(-1.75,0)
  silkscreen extent -4,-4 4,4, body extent -4.01,-4 4,4, height 12
"CAP TH ALUM ELEC D5.00mm S2.00mm H11.00mm" [mm] "5mm Diameter 2mm Lead Spacing Aluminum Electrolytic Capacitors Radial, Can"
  oval 1.3x1.95 hole 0.7: 1(1,0) 2(-1,0)
  silkscreen extent -2.5,-2.5 2.5,2.5, body extent -2.51,-2.5 2.5,2.5, height 11
"CAP TH ALUM ELEC D10.00mm S5.00mm H17.00mm" [mm] "10mm Diameter 5mm Lead Spacing Aluminum Electrolytic Capacitors Radial, Can"
  oval 1.4x2.1 hole 0.8: 1(2.5,0) 2(-2.5,0)
  silkscreen extent -5,-5 5,5, body extent -5.01,-5 5,5, height 17
"CAP TH ALUM ELEC D10.00mm S5.00mm H21.00mm" [mm] "10mm Diameter 5mm Lead Spacing Aluminum Electrolytic Capacitors Radial, Can"
  oval 1.4x2.1 hole 0.8: 1(2.5,0) 2(-2.5,0)
  silkscreen extent -5,-5 5,5, body extent -5.01,-5 5,5, height 21
"CAP: 0805" [mm]
  rect 1x1.25 smd: 1(-1,0) 2(1,0)
  silkscreen extent -1.7,-0.83 1.7,0.83, body extent -1,-0.62 1,0.63, height 0.78
"CAP: 1206" [mm]
  rect 1x1.6 smd: 1(-1.5,0) 2(1.5,0)
  silkscreen extent -2.2,-1 2.2,1, body extent -1.6,-0.8 1.6,0.8, height 1
DO-219AD [mm]
  rect 2x1.1 smd: 1(-0.8,0)
  rect 0.8x0.8 smd: 2(1.1,0)
  silkscreen extent 0.4,-0.65 1.1,0.65, body extent -1.69,-0.65 1.42,0.65, height 0.83
DS1014-16S [mm] "BH2-10 pitch 2mm, 2x8"
  rect 1.3x1.3 hole 0.8: 1(0,0)
  round 1.3 hole 0.8: 2(0,2) 3(2,0) 4(2,2) 5(4,0) 6(4,2) 7(6,0) 8(6,2) 9(8,0) 10(8,2)
  round 1.3 hole 0.8 unplated: 11(10,0) 12(10,2) 13(12,0) 14(12,2) 15(14,0) 16(14,2)
  silkscreen extent -4.55,-2.4 18.5,3.7, body extent -4.55,-1.69 18.5,3.7, height 8.1
DS1074-5MV [mm]
  round 2.4 hole 1.8 unplated: 1(0,0) 2(5.08,0) 3(10.16,0) 4(15.24,0) 5(20.32,0)
  silkscreen extent -2.54,-5.9 22.85,4.8, body extent -2.54,-5.9 22.86,4.87, height 3.66
NetTie [mm] "From(0805)"
  rect 1x1.25 smd: 1(0,0) 2(2,0)
  silkscreen extent -0.7,-0.83 2.7,0.83
OAR5 [mm]
  round 1.905 hole 1.27: 1(0,0) 2(20.32,0)
  silkscreen extent 2.54,-0.82 17.78,0.83, body extent -0.99,-1 21.31,1, height 22.4
SIL05 [mm]
  rect 1.381x1.381 hole 0.85: 1(0,0)
  round 1.381 hole 0.85: 2(7.62,0) 3(12.7,0) 4(20.32,0)
  silkscreen extent -1.91,-3.18 22.22,3.17, body extent -1.91,-3.18 22.22,3.17, height 8.23
SOD-323 [mm]
  rect 1.085x0.55 smd: 1(-1.14,0) 2(1.14,0)
  silkscreen extent -1.68,-0.64 0.83,0.64, body extent -1.25,-0.64 1.25,0.64, height 1.17
SOD-323F [mm]
  rect 1.006x0.392 smd paste+0 mask+0: 1(-1,0)
  rrect100% 1.006x0.392 smd paste+0 mask+0: 2(1,0)
  silkscreen extent -1.46,-0.65 0.85,0.82, body extent -1.6,-0.73 1.6,0.73, height 0.25
SOT-23-3 [mm]
  rect 1.05x0.7 smd: 1(0,0) 2(0,-1.9) 3(2.3,-0.95)
  silkscreen extent -0.53,-2.41 1.43,0.6, body extent -0.05,-2.41 2.35,0.51, height 1.2
SOT-23-4 [mm]
  rect 1.8x0.9 smd: 1(0,0) 2(0,2.3) 3(0,4.6)
  rect 1.8x3.2 smd: 4(-6,2.3)
  silkscreen extent -4.75,-0.95 0.9,5.55, body extent -6.5,-0.95 0.5,5.55, height 1.65
SOT-23-5 [mm] "pitch 0.95 mm"
  rect 1.1x0.6 smd: 1(-1.3,0.95) 2(-1.3,0) 3(-1.3,-0.95) 4(1.3,-0.95) 5(1.3,0.95)
  round 0.5 on Mech1: ""(-1.1,1.1)
  silkscreen extent -1.9,-1.4 0.25,1.6, body extent -1.5,-1.5 1.5,1.5, height 1.3
WSL5931L5000FEA [mm]
  rect 5.2x8.75 smd: 1(-5.4,0) 2(5.4,0)
  silkscreen extent -8.6,-3.87 2.4,3.87, body extent -7.5,-3.87 7.5,3.88, height 0.96
К10-47Мб-L7.5 [mm]
  round 1 hole 0.7: 1(0,0) 2(5,0)
  silkscreen extent -1.25,-2.65 6.25,2.65
К10-47Мб-L9 [mm]
  round 1.2 hole 0.8: 1(-2.5,0) 2(2.5,0)
  silkscreen extent -4.5,-2.65 4.5,2.65
С2-29В-0,25(140.02.0204.00.00) [mm] "Резисторы постоянные непроволочные прецизионные С2-29В, производитель \"АО\"НПО\"ЭРКОН\""
  round 1.85 hole 1.2: 1(-8.75,0) 2(8.75,0)
  silkscreen extent -10.1,-2.25 10.1,2.25, body extent -9.15,-2.25 9.15,2.25, height 5.5
С2-29В-0,125(140.02.0202.00.00) [mm] "Резисторы постоянные непроволочные прецизионные С2-29В, производитель \"АО\"НПО\"ЭРКОН\""
  round 1.5 hole 0.8: 1(-6.25,0) 2(6.25,0)
  silkscreen extent -7.4,-1.75 7.4,1.75, body extent -6.55,-1.75 6.55,1.75, height 4.5
С2-29В-0,125(220.03.0401.00.00) [mm] "Резисторы постоянные непроволочные прецизионные С2-29В, производитель \"АО\"НПО\"ЭРКОН\""
  round 1.5 hole 0.8: 1(-1.875,0) 2(1.875,0)
  silkscreen extent -3.03,-1.72 3.63,1.78, body extent -2.17,-1.72 3.63,1.78, height 11.3
УШЯИ.685442.092vs2Rel [mm]
  round 3 hole 1.5 mask-10: 17(3,-9.5) 18(3,9.5) 19(45,-9.5) 20(45,9.5)
  silkscreen extent -6,-12.05 55,12, body extent -14.9,-9.75 62.9,9.75, height 24
УШЯИ.685631.123 [mm]
  round 8 hole 8 unplated: 0(0,0)
  body extent -7,-7 7,6.99, height 12.24

## Part data
DA1: "Very Low Supply Current / 3-Pin Microprocessor Reset / Monitors"
DA6 DA10: "30 V, High Speed, Low Noise, Low Bias / Current, JFET Operational Amplifier"
DA7 DA11: "LC2MOS Precision Quad SPST Switches"
DA8: "Single-Supply, Differential, 18-Bit ADC Driver"
DA9: "Rail-to-Rail I/O Amplifiers 2.7 V, 800 μA, 80 MHz"
DA16: "40V, High-Speed Comparators"
DA17 DA18 DA19: "TPS7A470x 36-V, 1-A, 4-µVRMS, RF LDO Voltage Regulator"
DA20: "TPS7A33 –36-V, 1-A, Ultralow-Noise Negative Voltage Regulator"
DD1: "Quad 2-Input NAND Gate High-Performance Silicon-Gate CMOS."
DD2 DD6: "Quad 2-Input AND Gate High-Performance Silicon-Gate CMOS"
DD3: "Decoder/Demultiplexer Dual 2-to-4"
DD4: "Дешифратор-демультиплексор IN74HC138A / 3-8 с инверсией на выходе"
DD5: "8-Bit SIPO Register w/ Latch & 3-State"
K1 K2 K3 K4 K5 K6 K7: "Relay or Contactor"
R5 R6 R7 R8 R9 R12 R14: "Резисторы постоянные непроволочные прецизионные С2-29В, производитель \"АО\"НПО\"ЭРКОН\"\"АО\"НПО\"ЭРКОН\"", Категории качества=ВП, Ряд сопротивлений=Е192, ТУ="ОЖО.467.099 ТУ"
  R5: Диапазон значений номинальных сопротивлений="от 1 Ом до 5,11 МОм", Номинальная мощность рассеяния="0,25 Вт"
  R6 R7 R8 R9 R12 R14: Диапазон значений номинальных сопротивлений="от 1 Ом до 1 МОм", Номинальная мощность рассеяния="0,125 Вт"
VD1 VD6 VD7 VD8 VD9 VD10 VD11 VD12 VD13 VD22 VD23 VD24 VD25: "Small Signal Fast Switching Diod"
VD2 VD3 VD4 VD5: "General Purpose Plastic Rectifier"
VD14 VD15 VD16 VD17 VD18 VD19 VD20 VD21: "Surface-Mount TMBS® (Trench MOS Barrier Schottky) Rectifier"
XP1: "pitch 2mm, 16 pin 2x8, straight"
XP2 XP3: "Connector"
R1: ModelPrint=0402
R2 R23 R24 R25 R26 R27 R29 R38 R41 R49 R50 R51 R52: ModelPrint=0805
R3 R4 R10 R11 R13 R15 R16 R17 R18 R19 R20 R21 R22 R28 R30 R31 R32 R33 R34 R35 R36 R37 R39 R40 R42 R43 R44 R45 R46 R47 R48 R53 R54 R55 R56 R57: ModelPrint=1206
XP4: 1=~8, 2=~8, 3=GND, 4=~12, 5=~12

## Free pads (board coordinates)
  round 3 hole 3 unplated: 0(5,5) 0(5,110) 0(95,110) 0(110,5) 0(110,110) 0(118,110) 0(125,110) 0(215,5) 0(215,110)
  round 3 hole 2 unplated: 0(17.146,39.4)
  round 4 hole 4 unplated: 0(20,5) 0(200,5)
  round 3 hole 3 unplated mask-25.4: 0(45,5)
  round 1.2 hole 0.8 unplated: 2(48.4,36.6) 3(53.6,36.6)

## Via types
v1: diameter 0.8, hole 0.5, Top Layer, Top to Bottom Layer, Bottom, 48 vias
v2: diameter 0.6, hole 0.3, Top Layer, Top to Bottom Layer, Bottom, 36 vias
v3: diameter 1.27, hole 0.711, Top Layer, Top to Bottom Layer, Bottom, 2 vias

## Nets (pads, with @x,y where several pads share a name; then routed paths per layer and width w, separated by ;. In a path a pad name is that pad's centre, name@x,y a point inside that pad or via, vN(x,y) a via of type N, cw(c..) or ccw(c..) an arc to the next point about the centre after c; other vN are vias at no path point)
+4.096V: C6.2 DA5.6 DA9.3 R23.1 R24.1 R44.2 | length 128.2
  Top Layer, Top w0.254: R44.2@141.232,60.146 141.232,59.846 141.605,59.473 142.809,59.473 142.936,59.346 v1(143.084,59.346) ; v1(151.6,57.3) 156.7,57.3 v1(158.8,55.2) ; v1(161.8,55.4) 161.813,55.386 205.986,55.386 v1(206,55.373) ; R23.1@194.868,92.02 R24.1@196.968,92.02 197.093,92.02 197.974,92.901 200.599,92.901 209.8,83.7 209.8,67.685 208.38,66.265 DA5.6@207.942,66.265 205.955,66.265 ; DA9.3@202.66,74.05 203.078,74.05 205.955,71.173 205.955,66.265 ; v1(206,58.627) 205.955,58.672 C6.2@205.955,63 205.955,66.265
  Bottom Layer, Bottom w0.254: v1(143.084,59.346) 143.084,57.349 143.233,57.2 151.5,57.2 v1(151.6,57.3) ; v1(158.8,55.2) 158.948,55.2 159.148,55.4 v1(161.8,55.4) ; v1(206,55.373) v1(206,58.627)
+5.2V: C9.1 DA1.3 DA7.12 DA8.3 DA11.12 DA16.8 DD1.14 DD2.10 DD2.14 DD3.15 DD3.16 DD4.6 DD4.16 DD5.16 DD6.14 K1.2 K2.2 K3.2 K4.2 K5.2 K6.2 K7.2 NT2.2 R55.1 XP1.1 XP1.7 | length 169
  Top Layer, Top w0.254: DD4.6@108.287,85.228 DD3.16@111.488,85.229 DD3.15@111.488,86.498 ; DA7.12@167.613,79.583 167.654,79.542 167.654,77.846 v1(167.695,77.805) ; DA11.12@167.689,93.746 167.692,93.743 167.692,91.888 v1(167.695,91.885) ; v1(181.2,67.2) 181.2,61.458 182.768,59.89 DD6.14@183.8,59.89 ; v1(190.5,85.4) 190.503,85.403 192.07,85.403 DA8.3@192.072,85.405 192.51,85.405 193.684,84.231 193.684,83.448 193.657,83.421 193.657,82.513 C9.1@193.284,82.14
  Bottom Layer, Bottom w0.254: K5.2@80.439,92.809 K5.2@80.598,92.65 ; XP1.7@145.3,104.7 145.3,102.7 146.3,101.7 161.6,101.7 167.695,95.605 v1(167.695,91.885) ; v1(181.2,67.2) 181.2,74.4 177.795,77.805 v1(167.695,77.805) v1(167.695,91.885) ; v1(190.5,85.4) 190.5,90.2 188.815,91.885 v1(167.695,91.885)
  Bottom Layer, Bottom w0.5: K7.2@80.28,101.128 80.439,100.969 K5.2@80.439,92.809 ; K5.2@80.598,92.65 K3.2@80.598,84.65 K2.2@80.598,76.15 K1.2@80.598,67.65 80.648,67.6 80.648,59.261 K4.2@80.697,59.211 K6.2@80.697,50.878
+8V: C4.1 C5.2 C20.2 DA2.8 DA3.8 DA4.8 DA5.2 DA6.7 DA9.7 DA10.7 DA13.5 DA14.8 DA15.5 DA18.13 DA18.15 DA18.16 NT1.2 VD2.2 VD4.2 VD23.2 | length 19.3
  Top Layer, Top w0.254: VD2.2@89.304,10.587 89.572,10.587 90.228,11.243 90.228,16.444 89.72,16.952 89.72,17.427 89.572,17.575 VD4.2@89.304,17.575 ; VD23.2@140.725,16.6 140.725,16.587 140.777,16.536 140.777,14.986 141.106,14.657 141.106,13.106 ; DA18.13@142.318,8.8 142.864,8.8 143.196,8.467 143.196,8.415 143.517,8.094 145.083,8.094 145.7,8.711 145.7,10.275 ; 160.881,12.869 160.881,13.846 161.436,14.4 161.742,14.4
+12V: DA7.4 DA11.4 NT3.2 VD1.2
-5.2V: XP1.9 XP1.15
-8V: DA2.4 DA3.4 DA4.4 DA6.4 DA7.13 DA10.4 DA11.13 DA13.2 DA14.4 DA15.2 DA20.2 NT4.2 VD3.1 VD5.1 | length 2.3
  Top Layer, Top w0.254: VD3.1@89.304,12.887 89.312,12.894 89.312,15.179 VD5.1@89.304,15.187
\K3: DD2.3 K4.1 | length 23.6
  Top Layer, Top w0.254: K4.1@88.317,59.211 93.181,59.211 101.2,67.23 101.2,72.739 102.2,73.739 DD2.3@102.7,73.739
\K4: VD1.1 VT1.2 VT1.4 | length 7.2
  Top Layer, Top w0.254: VD1.1@34.4,59.1 34.707,59.1 37,61.393 VT1.4@37,65
ADC_DRV_IN: DA13.1 R25.1 R41.2 | length 9.3
  Top Layer, Top w0.254: DA13.1@187.078,98.013 188.009,98.013 188.289,97.733 188.289,95.662 188.305,95.646 188.305,94.485 188.667,94.123 188.655,94.112 188.655,90.149 R25.1@188.784,90.02
AMP_IN: DA4.7 R13.2 R15.1 R20.1 R21.2 | length 159.7
  Top Layer, Top w0.254: DA4.7@55.412,15.835 55.849,15.835 56.504,16.49 58.1,16.49 59.419,15.171 59.419,12.832 64.471,7.78 78.916,7.78 R15.1@79.096,7.6 94.096,7.6 94.38,7.884 101.884,7.884 136.7,42.7 147.579,42.7 171.729,66.85 R21.2@171.729,73.47 172.102,73.843 177.7,73.843 178.082,73.843 178.039,73.8 R20.1@177.7,73.8
C': R16.2 VD2.1 VD3.2 VD7.1 VD12.2 XP2.1 XP2.2 | length 106
  Top Layer, Top w0.254: R16.2@60.6,13.49 60.6,12.5 64.5,8.6 84.77,8.6 86.757,10.587 VD2.1@87.024,10.587 ; VD3.2@87.024,12.887 VD2.1@87.024,10.587 ; VD12.2@138.972,50.154 139.539,49.587 VD7.1@141.372,49.587 141.372,49.28 141.303,49.211 140.911,49.211 113.6,21.9 XP2.1@110.6,21.9 XP2.2@108.06,21.9 96.091,9.931 88.604,9.931 87.948,10.587 VD2.1@87.024,10.587
CLK_ADI: DD6.1 DD6.2 XP1.12 | length 122
  Top Layer, Top w0.254: XP1.12@149.3,106.7 150.8,108.2 187.871,108.2 211.2,84.871 211.2,59.3 209.7,57.8 192.29,57.8 190.2,59.89 DD6.1@189.7,59.89 DD6.2@189.7,61.16
CLK_RgI: DD5.11 XP1.4 | length 52
  Top Layer, Top w0.254: DD5.11@116.912,76.295 116.474,76.295 114.5,78.269 114.5,94.236 127.941,107.677 140.323,107.677 XP1.4@141.3,106.7
DAT_ADI: DD6.6 XP1.10 | length 135.9
  Top Layer, Top w0.254: XP1.10@147.3,106.7 149.204,108.604 188.296,108.604 212.104,84.796 212.104,57.781 211.223,56.9 190.1,56.9 188.2,58.8 188.2,65.24 189.2,66.24 DD6.6@189.7,66.24